# Altium PCB Sumo_Motor_Stepper_DC.PCBDOC
Units mm, origin at the board's own origin, x right, y up, seen from the top; angles counter-clockwise.
Board outline 85 x 85 mm, 2 copper layers (Top Layer, Bottom Layer); 69 components, 59 nets, 220 pads, 82 vias.
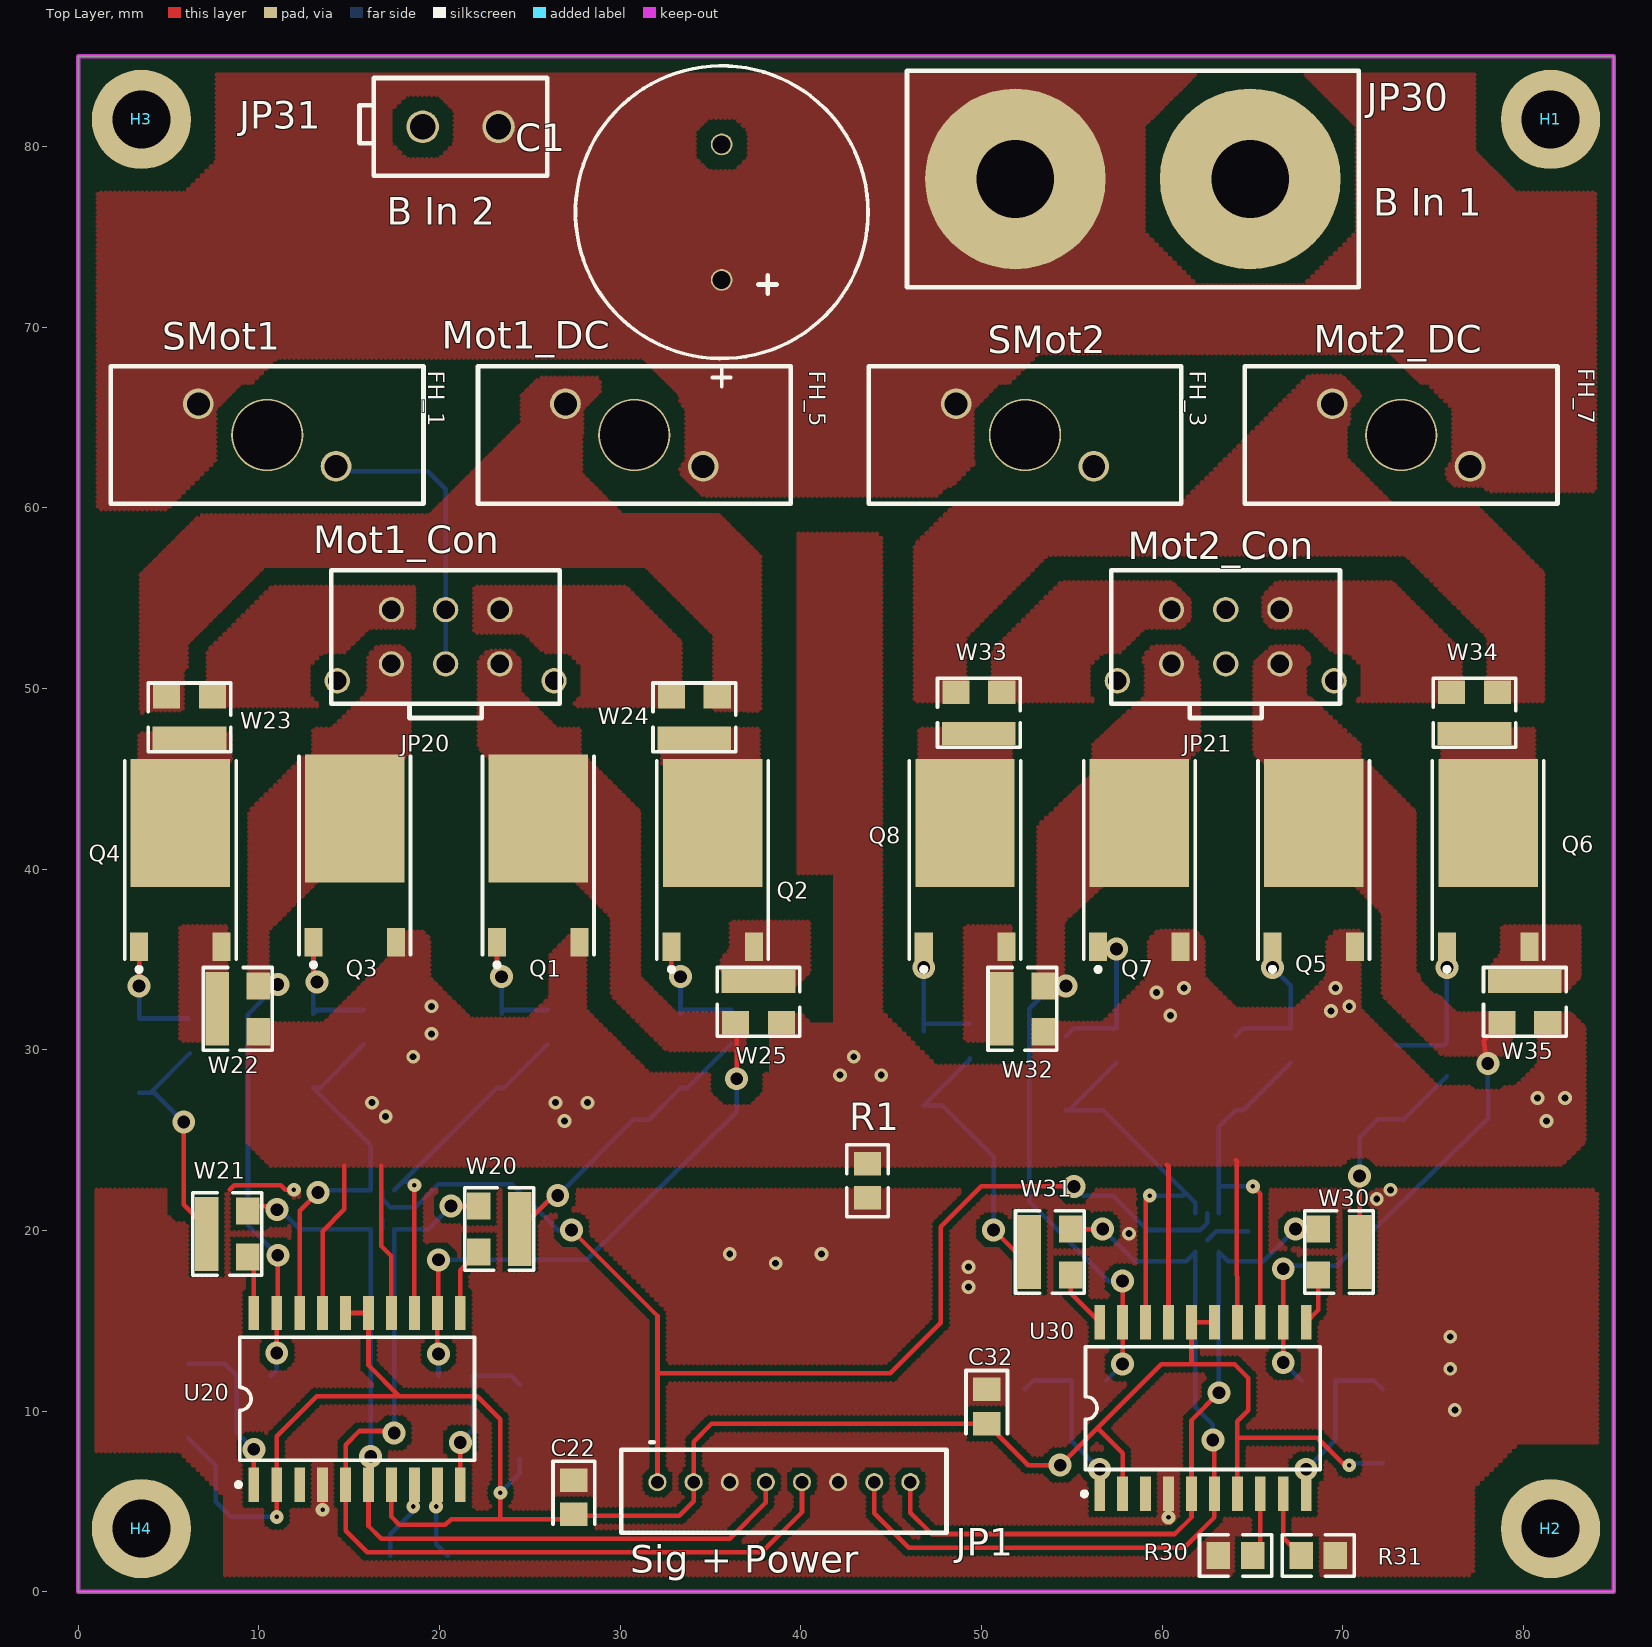
[diagram p0: Top Layer view]
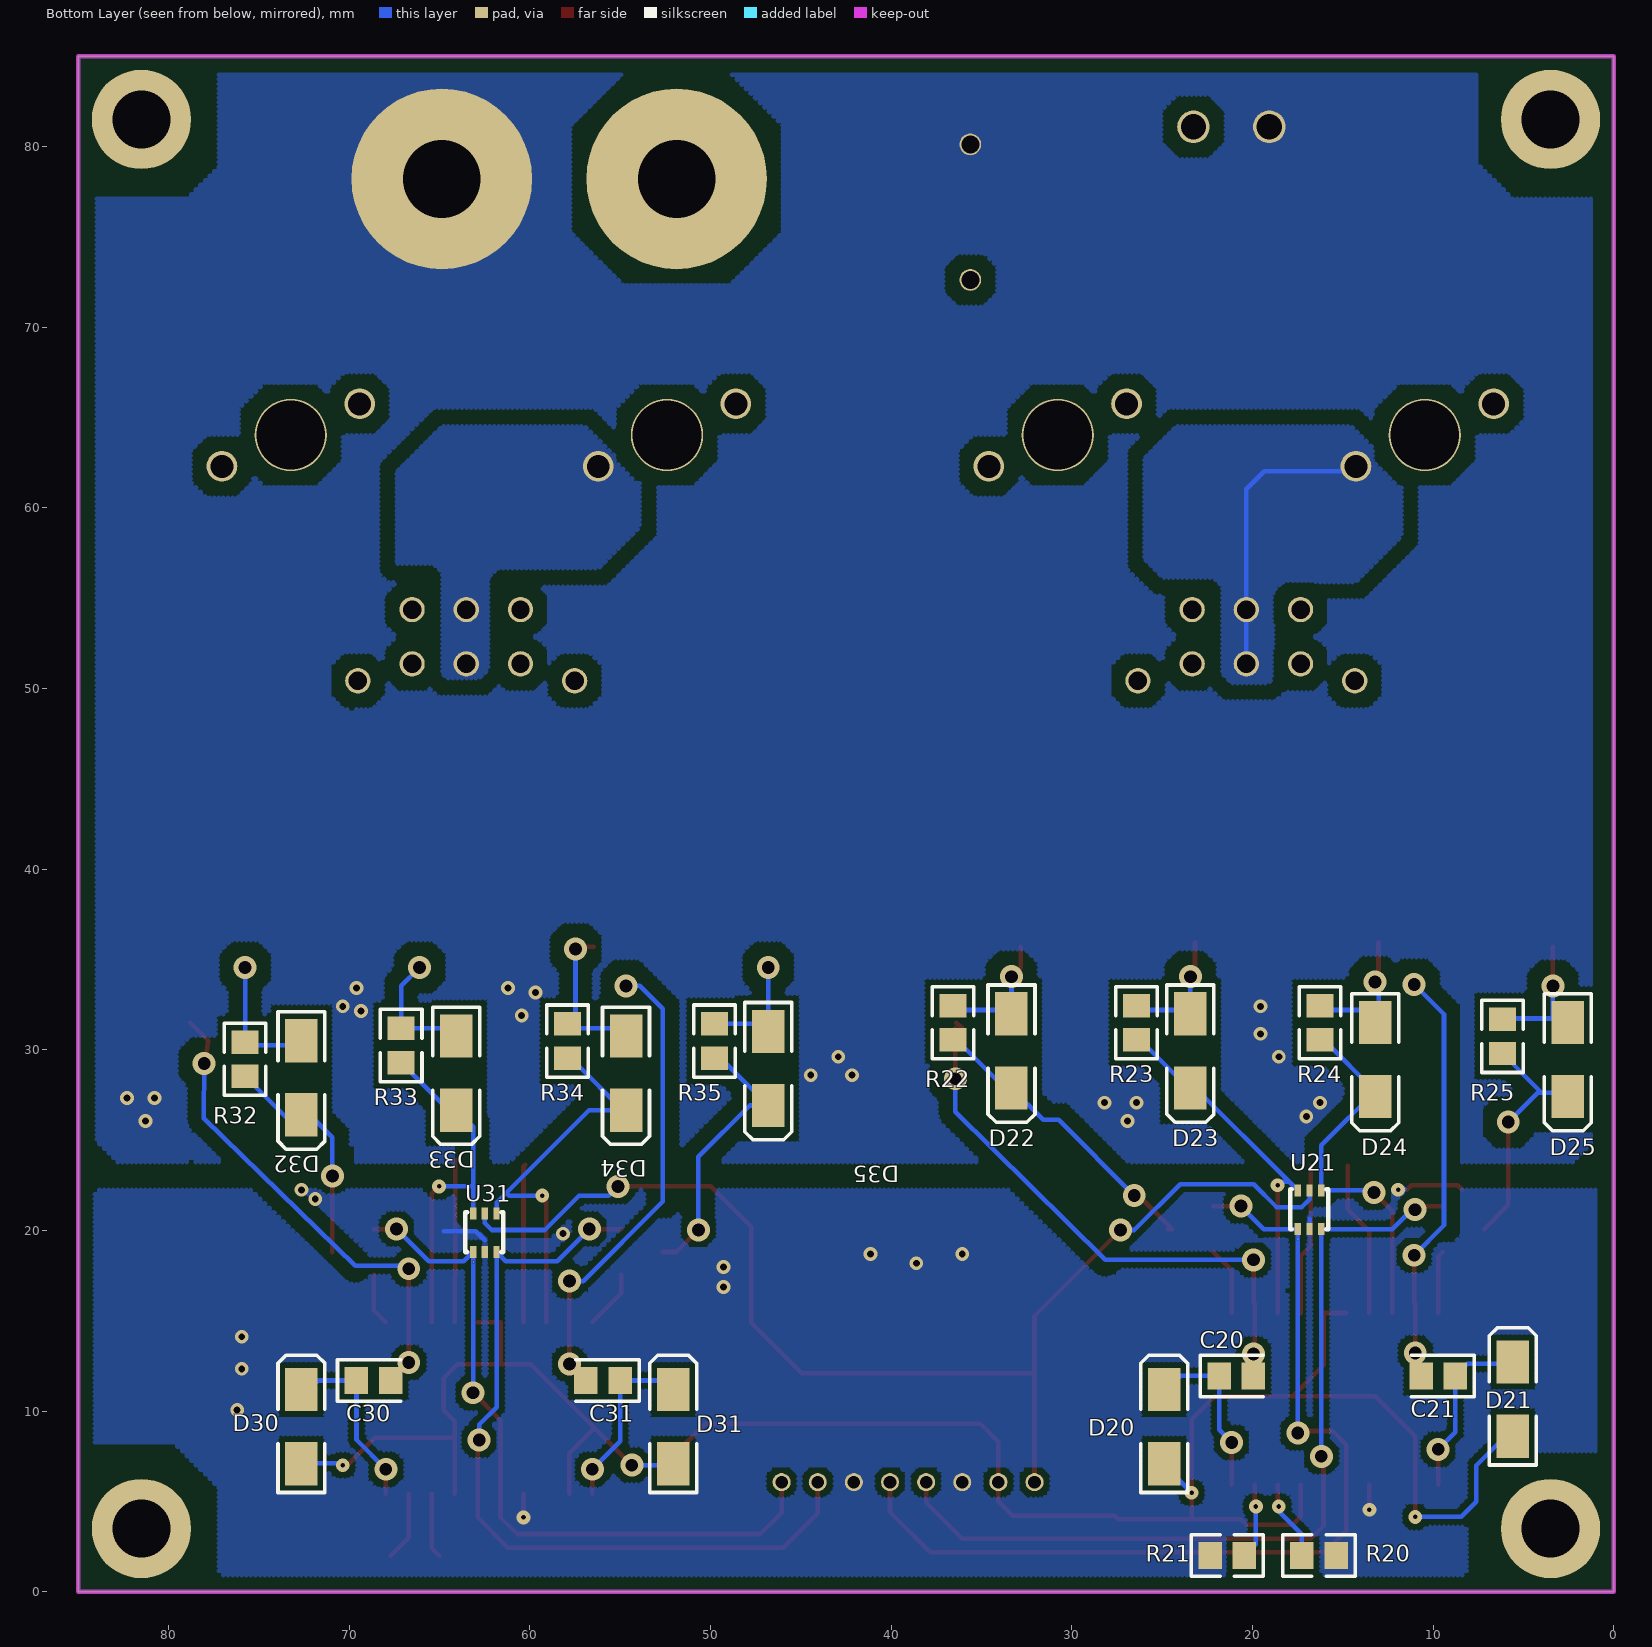
[diagram p1: Bottom Layer view, seen from below]

## Layer stack, top to bottom
Top Layer: signal copper 0.0356
Dielectric: dielectric 0.32, FR-4, Dk 4.8
Bottom Layer: signal copper 0.0356

## Board outline
0,0 0,85 85,85 85,0

## Design rules (kind name [scope] priority, off if disabled: settings)
Clearance "Clearance_Polygon VBat" [InRegion(1110 ,2000 ,4440 ,4410)] p1: gap=0.762
Clearance [All] p2: gap=0.306
ComponentClearance [All] p1: gap=0.254 collisioncheckmode=0
PolygonConnect [All] p1: connectstyle=Direct reliefconductorwidth=0.254 reliefentries=4 polygonreliefangle="90 Angle"
RoutingLayers [All] p1: top layer=Horizontal bottom layer=Vertical
RoutingVias [All] p1: holewidth=0.254 width=0.762 viastyle="Through Hole" minholewidth=0.254 minwidth=0.381 maxholewidth=0.711 maxwidth=1.27
SolderMaskExpansion [All] p1: expansion=0.102
TestPointUsage [All] p1: valid=0 allowmultiple=FALSE
Testpoint [All] p1: side=15 testpointundercomponent=TRUE minsize=1.016 maxsize=2.54 preferedsize=1.524 minholesize=0 maxholesize=1.016 preferedholesize=0.813 testpointgrid=0.025 style=1023 order=1234567890
Width [All] p1: maxlimit=0.254 minlimit=0.254 preferedwidth=0.254
16 further rules are at their usual default settings.

## Classes and differential pairs
component class Sumo_Motor_Stepper_DC: C20 C21 C22 C30 C31 C32 D20 D21 D22 D23 D24 D25 D30 D31 D32 D33 D34 D35 Q1 Q2 Q3 Q4 Q5 Q6 Q7 Q8 R20 R21 R22 R23 R24 R25 R30 R31 R32 R33 R34 R35 U20 U21 U30 U31 W20 W21 W22 W23 W24 W25 W30 W31 W32 W33 W34 W35
component class Connectors: C1 FH_1 FH_3 FH_5 FH_7 H1 H2 H3 H4 JP1 JP20 JP21 JP30 JP31 R1

## Components (designator, comment, footprint, x,y, rotation, side; value= is the part's Value field where it differs from the comment)
C1 "Cap Pol1" CAPPOL7.5-16 35.62,72.616 r90 top
C20 "Cap Pol3" CC2012-0805 20.895,11.95 r180 bottom
C21 "Cap Pol3" CC2012-0805 9.719,11.95 r0 bottom
C22 "Cap" CC2012-0805 27.432,5.23 r270 top
C30 "Cap Pol3" CC2012-0805 68.647,11.696 r180 bottom
C31 "Cap Pol3" CC2012-0805 55.947,11.696 r0 bottom
C32 "Cap" CC2012-0805 50.292,10.248 r270 top
D20 "Diode" SMA 24.892,9.144 r90 bottom
D21 "Diode" SMA 5.588,10.668 r90 bottom
D22 "Diode" SMA 33.341,29.938 r270 bottom
D23 "Diode" SMA 23.435,29.938 r270 bottom
D24 "Diode" SMA 13.208,29.464 r270 bottom
D25 "Diode" SMA 2.54,29.464 r270 bottom
D30 "Diode" SMA 72.644,9.144 r90 bottom
D31 "Diode" SMA 52.07,9.144 r90 bottom
D32 "Diode" SMA 72.644,28.448 r270 bottom
D33 "Diode" SMA 64.075,28.714 r270 bottom
D34 "Diode" SMA 54.677,28.714 r270 bottom
D35 "Diode" SMA 46.803,28.968 r270 bottom
FH_1 "SMot1" "FUSEHOLDER MINIBLADE" 1.811,67.83 r270 top
FH_3 "SMot2" "FUSEHOLDER MINIBLADE" 43.755,67.83 r270 top
FH_5 "Mot1_DC" "FUSEHOLDER MINIBLADE" 22.131,67.83 r270 top
FH_7 "Mot2_DC" "FUSEHOLDER MINIBLADE" 64.583,67.83 r270 top
H1 "M3 Clearance" "M3 Clearance"#1 113.964,12.988 r0 top
H2 "M3 Clearance" "M3 Clearance"#2 106.904,13.016 r0 top
H3 "M3 Clearance" "M3 Clearance"#3 100.136,13.18 r0 top
H4 "M3 Clearance" "M3 Clearance"#4 92.904,13.016 r0 top
JP1 "Sig + Power" "PHR 1x8 2mm" 32.064,6.068 r0 top
JP20 "Mot1_Con" "MICROFIT 2X3 3MM" 17.339,54.368 r180 top
JP21 "Mot2_Con" "MICROFIT 2X3 3MM" 60.519,54.368 r180 top
JP30 "B In 1" "Screw Terminals x 2 x M4" 51.876,78.204 r0 top
JP31 "B In 2" "Mini-Fit Jnr 2x1 4.2mm" 25.968,83.792 r180 top
Q1 "IRFR2405" TO-252AA 25.467,39.382 r0 top
Q2 "IRFR2405" TO-252AA 35.119,39.128 r0 top
Q3 "IRFR2405" TO-252AA 15.307,39.382 r0 top
Q4 "IRFR2405" TO-252AA 5.655,39.128 r0 top
Q5 "IRFR2405" TO-252AA 68.393,39.128 r0 top
Q6 "IRFR2405" TO-252AA 78.045,39.128 r0 top
Q7 "IRFR2405" TO-252AA 58.741,39.128 r0 top
Q8 "IRFR2405" TO-252AA 49.089,39.128 r0 top
R1 "Res Semi" CR2012-0805 43.688,22.756 r270 top
R20 "Res Semi" CR2012-0805 16.316,2.004 r0 bottom
R21 "Res Semi" CR2012-0805 21.396,2.004 r180 bottom
R22 "Res Semi" CR2012-0805 36.576,31.496 r90 bottom
R23 "Res Semi" CR2012-0805 26.416,31.496 r90 bottom
R24 "Res Semi" CR2012-0805 16.256,31.496 r90 bottom
R25 "Res Semi" CR2012-0805 6.163,30.746 r90 bottom
R30 "Res Semi" CR2012-0805 64.068,2.004 r0 top
R31 "Res Semi" CR2012-0805 68.64,2.004 r180 top
R32 "Res Semi" CR2012-0805 75.759,29.476 r90 bottom
R33 "Res Semi" CR2012-0805 67.123,30.238 r90 bottom
R34 "Res Semi" CR2012-0805 57.912,30.48 r90 bottom
R35 "Res Semi" CR2012-0805 49.784,30.48 r90 bottom
U20 "HIP4081AIBZ" SOIC20A 15.434,10.68 r0 top
U21 "SN74LVC2G14" SC70 17.915,20.078 r180 bottom
U30 "HIP4081AIBZ" SOIC20A 62.258,10.172 r0 top
U31 "SN74LVC2G14" SC70 63.567,18.808 r180 bottom
W20 "Jumper SMT 3Way" "JUMPER SMT 3 WAY" 24.451,20.078 r180 top
W21 "Jumper SMT 3Way" "JUMPER SMT 3 WAY" 7.112,19.812 r0 top
W22 "Jumper SMT 3Way" "JUMPER SMT 3 WAY" 7.687,32.27 r0 top
W23 "Jumper SMT 3Way" "JUMPER SMT 3 WAY" 6.163,47.256 r90 top
W24 "Jumper SMT 3Way" "JUMPER SMT 3 WAY" 34.103,47.256 r90 top
W25 "Jumper SMT 3Way" "JUMPER SMT 3 WAY" 37.659,33.794 r270 top
W30 "Jumper SMT 3Way" "JUMPER SMT 3 WAY" 70.933,18.808 r180 top
W31 "Jumper SMT 3Way" "JUMPER SMT 3 WAY" 52.645,18.808 r0 top
W32 "Jumper SMT 3Way" "JUMPER SMT 3 WAY" 51.121,32.27 r0 top
W33 "Jumper SMT 3Way" "JUMPER SMT 3 WAY" 49.851,47.51 r90 top
W34 "Jumper SMT 3Way" "JUMPER SMT 3 WAY" 77.283,47.51 r90 top
W35 "Jumper SMT 3Way" "JUMPER SMT 3 WAY" 80.077,33.794 r270 top

## Footprints (in the part's own frame and the unit in brackets; to place one, negate y for a bottom-side part, rotate by r counter-clockwise, add the part's x,y. Pads: shape width x height; smd on the part's side, far side on the other; paste and mask are expansions set on the pad)
CAPPOL7.5-16 [mm] "7.5P, 16D, 0.8PD"
  round 1.2 hole 1: 1(0,0) 2(7.5,0)
  silkscreen extent -5.9,-8.1 11.85,8.1
CC2012-0805 [mm]
  rect 1.3x1.5 smd: 1(-0.95,0) 2(0.95,0)
  silkscreen extent -2,-1.15 1.5,1.15
CR2012-0805 [mm]
  rect 1.3x1.5 smd: 1(-0.95,0) 2(0.95,0)
  silkscreen extent -2,-1.15 2,1.15
"FUSEHOLDER MINIBLADE" [mm] "FuseHolder Miniblade"
  round 1.7 hole 1.27: 1(2.07,4.84) 2(5.53,12.46)
  round 4 hole 3.8: ""(3.8,8.65)
  silkscreen extent 0,0 7.6,17.3
"JUMPER SMT 3 WAY" [mm]
  rect 1.3x4.084 smd: 1(0,0)
  rect 1.3x1.5 smd: 2(2.286,1.27) 3(2.286,-1.27)
  silkscreen extent -0.76,-2.29 3.05,2.29
"M3 Clearance"#1 [mm] "M3 Clearance.   3.2mm ID for M3 screw"
  round 5.5 hole 3.2: 1(-32.464,68.512)
"M3 Clearance"#2 [mm] "M3 Clearance.   3.2mm ID for M3 screw"
  round 5.5 hole 3.2: 1(-25.404,-9.516)
"M3 Clearance"#3 [mm] "M3 Clearance.   3.2mm ID for M3 screw"
  round 5.5 hole 3.2: 1(-96.636,68.32)
"M3 Clearance"#4 [mm] "M3 Clearance.   3.2mm ID for M3 screw"
  round 5.5 hole 3.2: 1(-89.404,-9.516)
"MICROFIT 2X3 3MM" [mm] "microfit 2x3 3mm 5A"
  round 1.4 hole 1.02: 1(0,0) 2(-3,0) 3(-6,0) 4(0,3) 5(-3,3) 6(-6,3) nc(-9,3.94) nc(3,3.94)
  silkscreen extent -9.33,-2.19 3.33,6
"Mini-Fit Jnr 2x1 4.2mm" [mm] "Mini-Fit Jnr 2x1 4.2mm pitch 9A"
  round 1.8 hole 1.4: 1(2.7,2.7) 2(6.9,2.7)
  silkscreen extent 0,0 10.4,5.4
"PHR 1x8 2mm" [mm] "JST PHR 1x8 2mm 2A"
  round 1 hole 0.7: 1(0,0) 2(2,0) 3(4,0) 4(6,0) 5(8,0) 6(10,0) 7(12,0) 8(14,0)
  silkscreen extent -2,-2.8 16,2.2
SC70 [mm] "6 pin, 0.65 pitch"
  rect 0.35x0.66 smd: 1(0.425,0) 2(1.075,0) 3(1.725,0) 4(1.725,2.14) 5(1.075,2.14) 6(0.425,2.14)
  silkscreen extent 0,0 2.1,2.2
"Screw Terminals x 2 x M4" [mm]
  round 10 hole 4.3: 1(0,0) 2(13,0)
  silkscreen extent -6,-6 19,6
SMA [mm] "DO-214-AC/SMA; 2 C-Bend Leads; Body 5 x 2.7 mm, inc. leads (LxW)"
  rect 2.4x1.8 smd: 1(-2.05,0) 2(2.05,0)
  silkscreen extent -3.65,-1.3 3.95,1.3
SOIC20A [mm]
  rect 0.6x1.9 smd: 1(-5.715,-4.75) 2(-4.445,-4.75) 3(-3.175,-4.75) 4(-1.905,-4.75) 5(-0.635,-4.75) 6(0.635,-4.75) 7(1.905,-4.75) 8(3.175,-4.75) 9(4.445,-4.75) 10(5.715,-4.75) 11(5.715,4.75) 12(4.445,4.75) 13(3.175,4.75) 14(1.905,4.75) 15(0.635,4.75) 16(-0.635,4.75) 17(-1.905,4.75) 18(-3.175,4.75) 19(-4.445,4.75) 20(-5.715,4.75)
  silkscreen extent -6.69,-4.87 6.5,3.4
TO-252AA [mm] "D-PAK/TO-252-AA; 3 Leads (1 Cropped); Body 10.4 (inc. leads) x 6.7 mm (LxW max)"
  rect 1x1.6 smd: 1(-2.285,-3.425) 3(2.285,-3.425)
  rect 5.5x7.1 smd: 4(0,3.425)
  silkscreen extent -3.08,-4.8 3.08,6.88

## Part data
C1: "Polarized Capacitor (Radial)"
C20 C21 C30 C31: "Polarized Capacitor (Surface Mount)"
C22 C32: "Capacitor"
D20 D21 D22 D23 D24 D25 D30 D31 D32 D33 D34 D35: "Default Diode"
FH_1 FH_3 FH_5: library part Fuse_Holder, "Fuse Holder"
FH_7: library part Fuse_Holder
H1 H2 H3 H4: library part "M3 Clearance hole", "3.2mm ID clearance hole for M3 screw"
JP1: library part "Header 8", "Header, 8-Pin"
JP20 JP21: library part "Header 6", "Header, 6-Pin"
JP30 JP31: library part "Header 2", "Header, 2-Pin"
Q1 Q2 Q3 Q4 Q5 Q6 Q7 Q8: "HEXFET Power MOSFET"
R1 R22 R23 R24 R25 R32 R33 R34 R35: "Semiconductor Resistor"
R20 R21 R30 R31: library part "RPot SM", "Square Trimming Potentiometer"
U20 U30: "80V/2.5A Peak, High Frequency Full Bridge FET Driver"
U21 U31: "Dual Schmitt-Trigger Inverter"

## Via types
v1: diameter 1.27, hole 0.711, Top Layer to Bottom Layer, 40 vias
v2: diameter 0.762, hole 0.381, Top Layer to Bottom Layer, 31 vias
v3: diameter 0.762, hole 0.254, Top Layer to Bottom Layer, 11 vias

## Nets (pads, with @x,y where several pads share a name; then routed paths per layer and width w, separated by ;. In a path a pad name is that pad's centre, name@x,y a point inside that pad or via, vN(x,y) a via of type N, cw(c..) or ccw(c..) an arc to the next point about the centre after c; other vN are vias at no path point)
5V: JP1.1 U21.5 U31.5 | length 68.2
  Top Layer w0.254: v1(27.305,20.027) 32.064,15.268 JP1.1 ; 32.064,12.088 44.958,12.088 47.752,14.882 47.752,20.216 49.976,22.44 v1(55.118,22.44)
  Bottom Layer w0.254: U21.5 16.84,21.729 17.272,21.297 18.669,21.297 19.939,22.567 24.003,22.567 26.543,20.027 v1(27.305,20.027) ; v1(55.118,22.44) 55.626,21.932 57.277,21.932 59.182,20.027 62.103,20.027 62.492,20.416 U31.5
12V: C22.2 C32.2 D20.1 D21.1 D30.1 D31.1 JP1.2 U20.2 U20.7 U20.15 U20.16 U30.2 U30.7 U30.15 U30.16 | length 122.8
  Top Layer w0.254: v3(10.989,4.147) 10.989,8.599 13.208,10.818 22.098,10.818 23.368,9.548 23.368,4.026 ; U20.16 U20.15 16.069,12.529 17.78,10.818 ; U20.7 17.339,4.147 17.78,3.706 20.32,3.706 20.64,4.026 27.432,4.026 27.62,4.214 33.274,4.214 34.064,5.004 34.064,8.306 35.056,9.298 C32.2 52.582,7.008 v1(54.356,7.008) 59.944,12.596 64.008,12.596 64.77,11.834 64.77,10.056 64.163,9.449 U30.7 ; 56.337,8.988 56.495,8.988 57.813,7.671 U30.2 ; 61.623,12.695 U30.16 U30.15 ; 64.163,8.532 68.58,8.532 70.104,7.008 v3(70.358,7.008)
  Bottom Layer w0.254: D21.1@6.096,8.514 7.62,6.99 7.62,4.976 8.449,4.147 v3(10.989,4.147) ; v3(23.368,5.484) 24.451,6.567 D20.1@24.451,7.36 ; D31.1@52.489,7.008 v1(54.356,7.008) ; v3(70.358,7.008) 70.456,7.106 D30.1@72.203,7.106
DGND: C22.1 C32.1 JP1.3 JP1.6 R1.2 R20.1 R21.1 R30.1 R31.1 U20.4 U21.2 U30.4 U31.2 | length 9.6
  Top Layer w0.254: 8.382,22.248 8.636,22.502 11.206,22.502 11.46,22.248 v3(11.938,22.248) ; v3(13.529,4.535) U20.4 ; v3(60.353,4.115) U30.4
  Bottom Layer w0.254: v3@11.613,22.248 v3@11.613,22.319 ; U21.2 16.84,20.648 ; 62.492,19.462 62.992,19.962 64.77,19.962
  other v2: 76.2,10.056 75.946,12.342 75.946,14.12 49.279,16.875 49.279,17.975 38.608,18.184 36.068,18.692 41.148,18.692 58.166,19.825 71.882,21.74 72.644,22.248
GND: C1.2 JP30.2 JP31.2 Q1.3 Q3.3 Q5.3 Q7.3 R1.1 U20.14 U20.17 U30.14 U30.17 W22.3 W25.2 W32.3 W35.2 | length 34.6
  Top Layer w0.254: U20.17 13.529,19.967 14.732,21.17 14.732,23.583 ; 16.764,23.583 16.764,19.138 17.339,18.563 U20.14 ; 60.265,23.634 60.353,23.546 U30.17 ; 64.075,23.888 64.163,23.8 ; 64.135,23.634 64.135,20.027 U30.14
  other v2: 26.924,26.058 81.28,26.058 17.018,26.312 16.256,27.074 26.416,27.074 28.194,27.074 80.772,27.328 82.296,27.328 42.164,28.598 44.45,28.598 18.542,29.614 42.926,29.614 19.558,30.884 60.452,31.9 69.342,32.154 19.558,32.408 70.358,32.408 59.69,33.17 61.214,33.424 69.596,33.424
MOT1_A: JP20.3 W24.2
MOT1_A\: C20.2 JP20.6 Q1.4 U20.12 W25.3 | length 31.4
  Top Layer w0.254: v1(19.939,18.376) 19.939,15.998 19.879,15.938 U20.12 19.879,13.22 v1(19.945,13.154) ; W25.3@36.068,31.187 W25.3 ; v1(36.45,28.4) W25.3@36.45,31.178
  Bottom Layer w0.254: v1(19.939,18.376) 28.142,18.376 36.451,26.567 v1(36.45,28.4) ; C20.2 v1(19.945,13.154)
MOT1_AHO_A: U20.11 W20.2 | length 3.8
  Top Layer w0.254: U20.11 21.149,17.792 W20.2
MOT1_B: JP20.1 W23.3
MOT1_B\: C21.2 JP20.4 Q3.4 U20.19 W22.2 | length 23.2
  Top Layer w0.254: v1(10.989,13.22) U20.19 10.989,15.938 11.049,15.998 v1(11.049,18.63)
  Bottom Layer w0.254: C21.2 10.989,12.27 v1(10.989,13.22) ; v1(11.049,18.63) 9.398,20.281 9.398,31.965 v1(11.049,33.616)
MOT1_BHO_B: U20.20 W21.3 | length 3.5
  Top Layer w0.254: W21.3@9.465,18.808 9.719,18.554 U20.20
MOT1_CENT: FH_1.2 JP20.2 JP20.5 | length 16.2
  Bottom Layer w0.254: FH_1.2@14.271,62.03 19.349,62.03 20.339,61.04 JP20.5
MOT1_DC: FH_5.1 W23.2 W24.3
MOT1_DC_DIS: U20.3
MOT1_GATE_A: D22.2 R22.1 W20.1 | length 16.2
  Top Layer w0.254: W20.1@24.689,20.078 W20.1 26.305,21.932 v1(26.543,21.932)
  Bottom Layer w0.254: v1(26.543,21.932) 30.734,26.123 31.576,26.123 D22.2 33.719,27.888 R22.1@36.135,30.304
MOT1_GATE_B: D25.2 R25.1 W21.1 | length 12.7
  Top Layer w0.254: v1(5.842,25.996) 5.842,21.415 W21.1@7.179,20.078
  Bottom Layer w0.254: D25.2@3.369,27.634 4.204,27.634 v1(5.842,25.996) ; 4.001,27.634 R25.1
MOT1_PWM_A: JP1.5 U20.5 U21.1 W20.3 | length 52.6
  Top Layer w0.254: v1(17.49,8.799) 17.387,8.902 15.561,8.902 14.799,8.14 14.799,3.385 16.002,2.182 37.846,2.182 40.064,4.4 JP1.5 ; v1(20.641,21.348) W20.3
  Bottom Layer w0.254: v1(17.49,8.799) U21.1 19.371,20.078 v1(20.641,21.348)
MOT1_PWM_A\: D23.2 R23.1 U20.13 U21.6 | length 19.6
  Top Layer w0.254: U20.13 v3(18.609,22.5)
  Bottom Layer w0.254: U21.6 17.966,22.694 ; v3(18.609,22.5) 18.415,22.694 17.966,22.694 ; R23.1@25.975,30.304 23.559,27.888 23.16,27.888 17.966,22.694
MOT1_PWM_B: JP1.4 U20.6 U21.3 W21.2 | length 48
  Top Layer w0.254: W21.2@9.465,21.348 v1@10.989,21.348 ; v1(16.19,7.499) 16.069,7.378 16.069,3.639 16.764,2.944 36.068,2.944 38.064,4.94 JP1.4
  Bottom Layer w0.254: v1@10.989,21.348 12.259,20.078 U21.3 v1(16.19,7.499)
  other v1: 11,21.15
MOT1_PWM_B\: D24.2 R24.1 U20.18 U21.4 | length 20.8
  Top Layer w0.254: U20.18 12.259,21.094 v1(13.275,22.11)
  Bottom Layer w0.254: v1(13.275,22.11) 13.383,22.218 U21.4 16.19,24.719 13.021,27.888 13.399,27.888 R24.1@15.815,30.304
MOT2_A: JP21.3 W34.2
MOT2_A\: C30.2 JP21.6 Q5.4 U30.12 W35.3 | length 27.1
  Top Layer w0.254: v1(66.703,12.69) v1(66.703,17.88) ; v1@78,29.225 77.791,30.492 W35.3
  Bottom Layer w0.254: v1(66.703,12.69) C30.2 ; v1(66.703,17.88) 66.869,18.046 69.663,18.046 78.016,26.174 ; v1(78.025,29.25) 78.041,26.199
MOT2_AHO_A: U30.11 W30.2 | length 2.9
  Top Layer w0.254: U30.11 68.647,15.596 W30.2
MOT2_B: JP21.1 W33.3
MOT2_B\: C31.2 JP21.4 Q7.4 U30.19 W32.2 | length 26.1
  Top Layer w0.254: v1(57.813,12.612) v1(57.813,17.196)
  Bottom Layer w0.254: v1(54.677,33.54) 53.915,33.54 52.645,32.27 52.645,21.602 57.051,17.196 v1(57.813,17.196) ; C31.2 v1(57.813,12.612)
MOT2_BHO_B: U30.20 W31.3 | length 3.3
  Top Layer w0.254: W31.3 54.931,16.534 U30.20
MOT2_CENT: FH_3.2 JP21.2 JP21.5
MOT2_DC: FH_7.1 W33.2 W34.3
MOT2_DC_DIS: U30.3
MOT2_GATE_A: D32.2 R32.1 W30.1 | length 12.6
  Top Layer w0.254: W30.1 v1(70.933,23.008)
  Bottom Layer w0.254: v1(70.933,23.008) 70.933,25.158 71.931,26.156 73.389,26.156 R32.1
MOT2_GATE_B: D35.2 R35.1 W31.1 | length 15.3
  Top Layer w0.254: v1(50.673,20.027) 51.892,18.808 W31.1
  Bottom Layer w0.254: R35.1@49.343,29.542 49.343,29.458 D35.2 47.837,26.918 50.673,24.082 v1(50.673,20.027)
MOT2_PWM_A: JP1.8 U30.5 U31.1 W30.3 | length 39.9
  Top Layer w0.254: JP1.8 46.064,4.378 47.244,3.198 60.706,3.198 61.623,4.115 61.623,9.498 v1(63.142,11.017) ; v1(67.377,20.078) W30.3
  Bottom Layer w0.254: v1(63.142,11.017) U31.1 63.65,18.3 65.599,18.3 v1(67.377,20.078)
MOT2_PWM_A\: D33.2 R33.1 U30.13 U31.6 | length 19.8
  Top Layer w0.254: v3(65.024,22.44) 65.433,22.031 U30.13
  Bottom Layer w0.254: U31.6 63.142,25.731 D33.2 64.499,26.664 R33.1 ; 63.142,22.44 v3(65.024,22.44)
MOT2_PWM_B: JP1.7 U30.6 U31.3 W31.2 | length 45
  Top Layer w0.254: JP1.7 44.064,4.346 45.974,2.436 61.214,2.436 62.893,4.115 62.893,8.306 v1(62.805,8.394) ; W31.2 v1(56.709,20.078)
  Bottom Layer w0.254: v1(56.709,20.078) 58.487,18.3 61.334,18.3 U31.3 61.842,10.225 62.805,9.262 v1(62.805,8.394)
MOT2_PWM_B\: D34.2 R34.1 U30.18 U31.4 | length 22.7
  Top Layer w0.254: U30.18 59.083,21.706 v3(59.309,21.932)
  Bottom Layer w0.254: D34.2 56.727,26.664 61.842,21.549 U31.4 ; D34.2@54.847,26.664 R34.1@57.471,29.288 ; v3(59.309,21.932) 61.13,21.932 61.282,22.084
NetC20_1: C20.1 D20.2 U20.10 | length 9.1
  Top Layer w0.254: U20.10 v1(21.149,8.272)
  Bottom Layer w0.254: v1(21.149,8.272) 21.845,8.968 C20.1 23.961,11.95 D20.2@24.451,11.46
NetC21_1: C21.1 D21.2 U20.1 | length 9.4
  Top Layer w0.254: U20.1 v1(9.719,7.886)
  Bottom Layer w0.254: D21.2@6.096,12.614 8.105,12.614 C21.1 8.769,8.836 v1(9.719,7.886)
NetC30_1: C30.1 D30.2 U30.10 | length 9.8
  Top Layer w0.254: U30.10 v1(67.973,6.782)
  Bottom Layer w0.254: v1(67.973,6.782) 69.597,8.406 C30.1 71.713,11.696 D30.2@72.203,11.206
NetC31_1: C31.1 D31.2 U30.1 | length 9.7
  Top Layer w0.254: U30.1 v1(56.543,6.782)
  Bottom Layer w0.254: D31.2@52.391,11.206 52.881,11.696 C31.1 54.997,8.328 v1(56.543,6.782)
NetD22_1: D22.1 Q2.1 R22.2 | length 6.8
  Top Layer w0.254: Q2.1 32.834,34.555 v1(33.341,34.048)
  Bottom Layer w0.254: v1(33.341,34.048) D22.1 33.557,32.204 R22.2@36.135,32.204
NetD23_1: D23.1 Q1.1 R23.2 | length 6.4
  Top Layer w0.254: Q1.1 23.182,34.301 v1(23.435,34.048)
  Bottom Layer w0.254: D23.1 v1(23.435,34.048) ; D23.1@23.651,32.204 R23.2@25.975,32.204
NetD24_1: D24.1 Q3.1 R24.2 | length 6.9
  Top Layer w0.254: v1@13.021,33.794 13.022,33.795 Q3.1
  Bottom Layer w0.254: v1@13.021,33.794 13.021,31.988 13.237,32.204 R24.2@15.815,32.204
  other v1: 13.225,33.75
NetD25_1: D25.1 Q4.1 R25.2 | length 6.7
  Top Layer w0.254: v1(3.369,33.54) 3.37,33.541 Q4.1
  Bottom Layer w0.254: v1(3.369,33.54) 3.369,31.734 R25.2@6.125,31.734
NetD32_1: D32.1 Q6.1 R32.2 | length 7
  Bottom Layer w0.254: D32.1@72.965,30.256 75.589,30.256 R32.2 v1(75.759,34.556)
NetD33_1: D33.1 Q5.1 R33.2 | length 7
  Bottom Layer w0.254: D33.1 64.499,31.188 R33.2 67.123,33.54 v1(66.107,34.556)
NetD34_1: D34.1 Q7.1 R34.2 | length 8.4
  Top Layer w0.254: Q7.1 57.34,35.703 v1(57.471,35.572)
  Bottom Layer w0.254: D34.1 54.695,30.764 55.119,31.188 57.471,31.188 v1(57.471,35.572)
NetD35_1: D35.1 Q8.1 R35.2 | length 5.9
  Top Layer w0.254: v1(46.803,34.556) v1@46.804,34.557
  Bottom Layer w0.254: D35.1 v1(46.803,34.556) ; D35.1@46.991,31.442 R35.2@49.343,31.442
NetQ2_3: Q2.3 W25.1
NetQ2_4: Q2.4 W24.1
NetQ4_3: Q4.3 W22.1
NetQ4_4: Q4.4 W23.1
NetQ6_3: Q6.3 W35.1
NetQ6_4: Q6.4 W34.1
NetQ8_3: Q8.3 W32.1
NetQ8_4: Q8.4 W33.1
NetR20_2: R20.2 U20.8 | length 4.5
  Top Layer w0.254: v3(18.542,4.722) 18.609,4.789 U20.8
  Bottom Layer w0.254: R20.2 17.266,3.192 18.542,4.468 v3(18.542,4.722)
NetR21_2: R21.2 U20.9 | length 4.2
  Top Layer w0.254: v3(19.812,4.722) 19.879,4.789 U20.9
  Bottom Layer w0.254: v3(19.812,4.722) 19.812,2.638 R21.2
NetR30_2: R30.2 U30.8 | length 3.6
  Top Layer w0.254: R30.2 65.433,2.419 U30.8
NetR31_2: R31.2 U30.9 | length 3.8
  Top Layer w0.254: U30.9 66.703,2.991 R31.2
VBAT: C1.1 FH_1.1 FH_3.1 FH_5.2 FH_7.2 JP30.1 JP31.1
pads on no net: FH_1. FH_3. FH_5. FH_7. H1.1 H2.1 H3.1 H4.1 JP20.nc JP21.nc

## Polygon pours and split planes (outlines as drawn)
GND on Top Layer (hatched 90Degree grid 0.254 track 0.254, remove dead copper): 80.839,32.016 82.617,32.016 83.379,31.254 83.379,24.904 82.109,23.634 54.169,23.634 52.899,24.904 52.899,31.508 56.709,31.508 59.249,34.048 59.249,36.08 59.757,36.588 61.789,36.588 62.297,36.08 62.297,34.048 64.075,32.27 67.377,32.27 69.155,34.048 69.155,36.08 69.663,36.588 70.933,36.588 70.933,32.27 75.251,27.952 79.569,27.952 80.839,29.222
GND on Top Layer (hatched 90Degree grid 0.254 track 0.254, remove dead copper): 38.354,31.965 40.005,31.965 40.513,31.457 40.513,25.107 38.989,23.583 10.668,23.583 9.398,24.853 9.398,30.314 10.541,31.457 13.589,31.457 17.272,35.14 17.272,36.537 19.05,36.537 19.431,36.156 19.431,33.997 21.717,31.711 24.892,31.711 26.162,32.981 26.162,35.267 27.432,36.537 28.067,36.537 28.067,32.219 31.623,28.663 38.354,28.663
DGND on Top Layer (hatched 90Degree grid 0.254 track 0.254, remove dead copper): 43.183,22.25 1.019,22.25 1.019,7.772 5.591,7.772 8.131,5.232 8.131,0.914 77.219,0.914 77.219,5.74 79.759,8.28 84.077,8.28 84.077,22.25
VBAT on Top Layer (hatched 90Degree grid 0.254 track 0.254, remove dead copper): 7.68,84.3 7.68,79.22 5.902,77.442 1.076,77.442 1.076,59.916 4.886,59.916 7.68,62.71 7.68,64.996 10.982,68.298 31.302,68.298 33.08,66.52 33.334,66.266 33.334,61.948 34.604,60.678 47.812,60.678 49.844,62.71 49.844,65.25 53.146,68.552 72.704,68.552 75.752,65.504 75.752,61.694 76.514,60.932 84.134,60.932 84.134,77.442 79.562,77.442 77.276,79.728 77.276,84.3
GND on Top Layer (hatched 90Degree grid 0.254 track 0.254, remove dead copper): 38.989,23.583 54.356,23.583 54.356,29.106 47.498,29.106 44.45,32.154 44.45,58.57 39.878,58.57 39.878,39.774 41.91,39.774 41.91,31.392 40.386,31.392
MOT1_B on Top Layer (hatched 90Degree grid 0.254 track 0.254, remove dead copper): 7.179,49.034 13.275,49.034 13.275,50.558 16.069,53.352 18.609,53.352 18.609,55.638 10.735,55.638 7.179,52.082
MOT1_A on Top Layer (hatched 90Degree grid 0.254 track 0.254, remove dead copper): 33.341,49.034 27.499,49.034 27.499,51.066 26.991,51.574 26.229,51.574 24.705,53.098 21.911,53.098 21.911,55.638 30.293,55.638 33.341,52.59
MOT1_A\ on Top Layer (hatched 90Degree grid 0.254 track 0.254, remove dead copper): 27.753,45.732 27.753,47.764 26.483,47.764 24.451,49.796 24.451,51.574 23.943,52.082 22.673,52.082 22.165,51.574 22.165,46.748 22.673,46.24 22.927,45.986 23.181,45.732
MOT1_B\ on Top Layer (hatched 90Degree grid 0.254 track 0.254, remove dead copper): 13.021,45.986 13.021,47.764 14.037,47.764 16.069,49.796 16.069,51.828 16.577,52.336 17.847,52.336 18.355,51.828 18.355,46.494 17.847,45.986
MOT1_DC on Top Layer (hatched 90Degree grid 0.254 track 0.254, remove dead copper): 35.21,48.664 35.21,52.982 31.4,56.792 10.318,56.792 6,52.474 6,48.664 3.46,48.664 3.46,56.284 6.762,59.586 19.462,59.586 22.51,62.634 24.542,64.666 24.542,66.19 25.558,67.206 28.86,67.206 28.86,64.92 27.844,63.904 27.844,61.872 30.13,59.586 35.464,59.586 37.75,57.3 37.75,48.664
NetQ4_4 on Top Layer (hatched 90Degree grid 0.254 track 0.254, remove dead copper): 8.449,45.986 8.449,47.51 3.369,47.51 3.369,45.986
NetQ2_4 on Top Layer (hatched 90Degree grid 0.254 track 0.254, remove dead copper): 35.881,47.764 37.659,47.764 37.659,45.732 32.325,45.732 32.325,47.51
MOT2_A\ on Top Layer (hatched 90Degree grid 0.254 track 0.254, remove dead copper): 65.091,51.392 66.107,52.336 67.885,52.336 68.139,52.1 68.139,49.506 70.933,46.911 70.933,45.732 65.853,45.732 65.091,46.439
MOT2_B\ on Top Layer (hatched 90Degree grid 0.254 track 0.254, remove dead copper): 62.043,50.68 62.043,51.39 61.027,52.336 59.249,52.336 58.995,52.099 58.995,49.498 56.201,46.897 56.201,45.478 61.281,45.478 61.281,45.951 62.043,46.66
MOT2_B on Top Layer (hatched 90Degree grid 0.254 track 0.254, remove dead copper): 50.613,49.288 56.455,49.288 56.455,50.812 58.995,53.352 61.027,53.352 61.535,53.86 61.535,54.876 60.519,55.892 54.423,55.892 50.613,52.082
MOT2_A on Top Layer (hatched 90Degree grid 0.254 track 0.254, remove dead copper): 76.521,49.288 70.679,49.288 70.679,50.812 68.139,53.352 66.107,53.352 65.599,53.86 65.599,55.13 66.361,55.892 72.711,55.892 76.267,52.336 76.521,52.082
MOT2_DC on Top Layer (hatched 90Degree grid 0.254 track 0.254, remove dead copper): 49.089,49.288 46.295,49.288 46.295,57.924 48.581,60.21 61.027,60.21 68.139,67.322 69.917,67.322 70.933,66.306 70.933,65.29 70.171,64.528 70.171,62.75 72.711,60.21 77.283,60.21 81.093,56.4 81.093,49.288 78.045,49.288 78.045,52.844 73.473,57.416 53.661,57.416 49.089,52.844
NetQ8_4 on Top Layer (hatched 90Degree grid 0.254 track 0.254, remove dead copper): 51.629,45.732 51.629,47.764 46.549,47.764 46.549,45.732
NetQ6_3 on Top Layer (hatched 90Degree grid 0.254 track 0.254, remove dead copper): 78.299,34.048 78.299,34.81 78.807,35.318 78.807,36.842 83.125,36.842 83.125,34.048 82.363,33.286 81.855,33.286
NetQ6_4 on Top Layer (hatched 90Degree grid 0.254 track 0.254, remove dead copper): 75.505,45.732 75.505,47.764 80.585,47.764 80.585,45.732
NetQ8_3 on Top Layer (hatched 90Degree grid 0.254 track 0.254, remove dead copper): 51.629,34.048 51.629,36.842 49.089,36.842 49.089,30.492 51.629,30.492
MOT2_B\ on Top Layer (hatched 90Degree grid 0.254 track 0.254, remove dead copper): 53.153,33.032 53.153,42.43 56.709,45.732 56.709,39.128 54.521,37.096 54.521,33.032
MOT2_A\ on Top Layer (hatched 90Degree grid 0.254 track 0.254, remove dead copper): 79.315,32.016 76.267,32.016 73.981,34.302 73.981,43.192 71.187,45.986 69.663,45.986 69.663,39.128 70.679,39.128 72.203,37.604 72.203,33.032 75.505,29.73 79.315,29.73
NetQ4_3 on Top Layer (hatched 90Degree grid 0.254 track 0.254, remove dead copper): 8.195,34.048 8.195,36.842 5.655,36.842 5.655,30.492 8.195,30.492
NetQ2_3 on Top Layer (hatched 90Degree grid 0.254 track 0.254, remove dead copper): 35.627,34.302 35.627,35.064 36.135,35.572 36.135,37.096 40.453,37.096 40.453,34.302 39.691,33.54 39.183,33.54
MOT1_B\ on Top Layer (hatched 90Degree grid 0.254 track 0.254, remove dead copper): 9.465,33.032 9.465,43.192 12.513,46.24 13.275,46.24 13.275,39.382 10.481,36.588 10.481,34.048
MOT1_A\ on Top Layer (hatched 90Degree grid 0.254 track 0.254, remove dead copper): 36.897,32.016 33.087,32.016 31.055,34.048 31.055,43.192 28.007,46.24 28.007,40.398 27.499,39.89 27.499,39.382 29.531,37.35 29.531,33.032 32.579,29.984 36.897,29.984
DGND on Bottom Layer (hatched 90Degree grid 0.254 track 0.254, remove dead copper): 43.18,22.248 1.016,22.248 1.016,7.77 5.588,7.77 8.128,5.23 8.128,0.912 77.216,0.912 77.216,5.738 79.756,8.278 84.074,8.278 84.074,22.248
GND on Bottom Layer (hatched 90Degree grid 0.254 track 0.254, remove dead copper): 77.216,84.224 77.216,78.89 78.994,77.112 84.074,77.112 84.074,25.042 82.804,23.772 2.286,23.772 1.27,24.788 1.27,77.112 5.588,77.112 7.62,79.144 7.62,84.224
MOT1_CENT on Bottom Layer (hatched 90Degree grid 0.254 track 0.254, remove dead copper): 14.545,64.528 11.751,61.734 11.751,58.432 13.021,57.162 14.291,55.892 18.355,55.892 18.863,55.384 18.863,50.558 19.117,50.304 21.149,50.304 21.657,50.812 21.657,55.638 22.165,56.146 24.959,56.146 25.975,57.162 25.975,62.75 24.197,64.528
MOT2_CENT on Bottom Layer (hatched 90Degree grid 0.254 track 0.254, remove dead copper): 56.963,64.528 53.915,61.48 53.915,58.94 56.201,56.654 61.789,56.654 62.297,56.146 62.297,51.066 62.805,50.558 64.583,50.558 64.837,50.812 64.837,56.4 65.345,56.908 67.377,56.908 67.377,61.988 64.837,64.528

## Keep-outs
Keep-Out Layer:
  the board outline again, w0.254

## Silkscreen, mask and mechanical layers (free items; w line width, h text height)
Top Overlay:
  lines w0.254: 37.652,72.362 38.668,72.362 ; 38.16,71.854 38.16,72.108 38.16,72.87
Mechanical 1:
  lines w0.254: -17.94,-0.028 -5.94,-0.028 ; -17.94,84.972 -5.94,84.972 ; -12.787,2.512 -11.94,-0.028 ; -12.787,82.432 -11.94,84.972 ; -11.94,34.135 -11.94,-0.028 ; -11.94,50.809 -11.94,84.972 ; -11.093,2.512 -11.94,-0.028 ; -11.093,82.432 -11.94,84.972 ; 0.06,-14.028 0.06,-2.028 ; 2.6,-8.875 0.06,-8.028 ; 2.6,-7.181 0.06,-8.028 ; 3.5,85.5 3.5,105.5 ; 6.04,94.653 3.5,95.5 ; 6.04,96.347 3.5,95.5 ; 34.223,-8.028 0.06,-8.028 ; 34.264,95.5 3.5,95.5 ; 50.736,95.5 81.5,95.5 ; 50.897,-8.028 85.06,-8.028 ; 78.96,94.653 81.5,95.5 ; 78.96,96.347 81.5,95.5 ; 81.5,85.5 81.5,105.5 ; 82.52,-8.875 85.06,-8.028 ; 82.52,-7.181 85.06,-8.028 ; 85.06,-14.028 85.06,-2.028 ; 85.551,3.348 105.551,3.348 ; 85.551,81.348 105.551,81.348 ; 94.704,5.888 95.551,3.348 ; 94.704,78.808 95.551,81.348 ; 95.551,34.112 95.551,3.348 ; 95.551,50.583 95.551,81.348 ; 96.397,5.888 95.551,3.348 ; 96.397,78.808 95.551,81.348
  text "78 (mm)" at 34.518,94.078 h2.54
  text "85 (mm)" at -10.416,34.389 h2.54 r90
  text "78 (mm)" at 96.973,34.366 h2.54 r90
  text "85 (mm)" at 34.477,-9.552 h2.54